# EAGLE board Solar-hydronode (EAGLE 9.7.0)

Size 119.78 x 57.17 mm. Coordinates in mm from the lower left corner, seen from the top.
Outline: 0,0 119.78,0 119.78,57.17 0,57.17 0,0
Copper layers (1*16): Top 0.035mm / dielectric 1.5mm / Bottom 0.035mm
Design rules "default": minimum track width 6mil, minimum drill 0.35mm, track to track 6mil, track to pad 6mil, pad to pad 6mil, via to via 6mil, smd to smd 6mil, copper to edge 40mil, drill to drill 6mil, minimum pad ring 10mil, minimum via ring 8mil, stop-mask expansion 4mil, vias tented up to drill 0mil, thermal gap 10mil

## Footprints (pad centres in the part's own frame; a part is rotated, then mirrored left to right if it is on the bottom)
BATTERY-GENERIC = drill 1.118 pad 3.15 octagon: + 2.54,0; - -2.54,0
SWITCH-SPDT-PTH-8.5X3.7MM = drill 1.016 pad 1.88: 1 -2.54,0; 2 0,0; 3 2.54,0

## Placement (x,y rotation side)
BAT3.6_V_LI-ION_BATTERY  1.5V  [BATTERY-GENERIC]  8.26,17.66 0 top
SCSOLAR  BATTERYGENERIC  [BATTERY-GENERIC]  83.13,8.26 0 top
SSWITCH  TOGGLE  [SWITCH-SPDT-PTH-8.5X3.7MM]  112.37,50.18 0 top

## Library data of the parts
BAT3.6_V_LI-ION_BATTERY SCSOLAR SSWITCH = Tinkercad